# Altium PCB AC_board.PcbDoc (part 3 of 3)
Units mil, origin at the board's own origin, x right, y up, seen from the top; angles counter-clockwise.
Board outline 5905.51 x 3937.01 mil, 4 copper layers (Top Layer, Layer 1, Layer 2, Bottom Layer), stack 31.891 mil thick; 42 components, 37 nets, 171 pads, 2365 vias.
Unrouted connection lines stored in the file: 10.
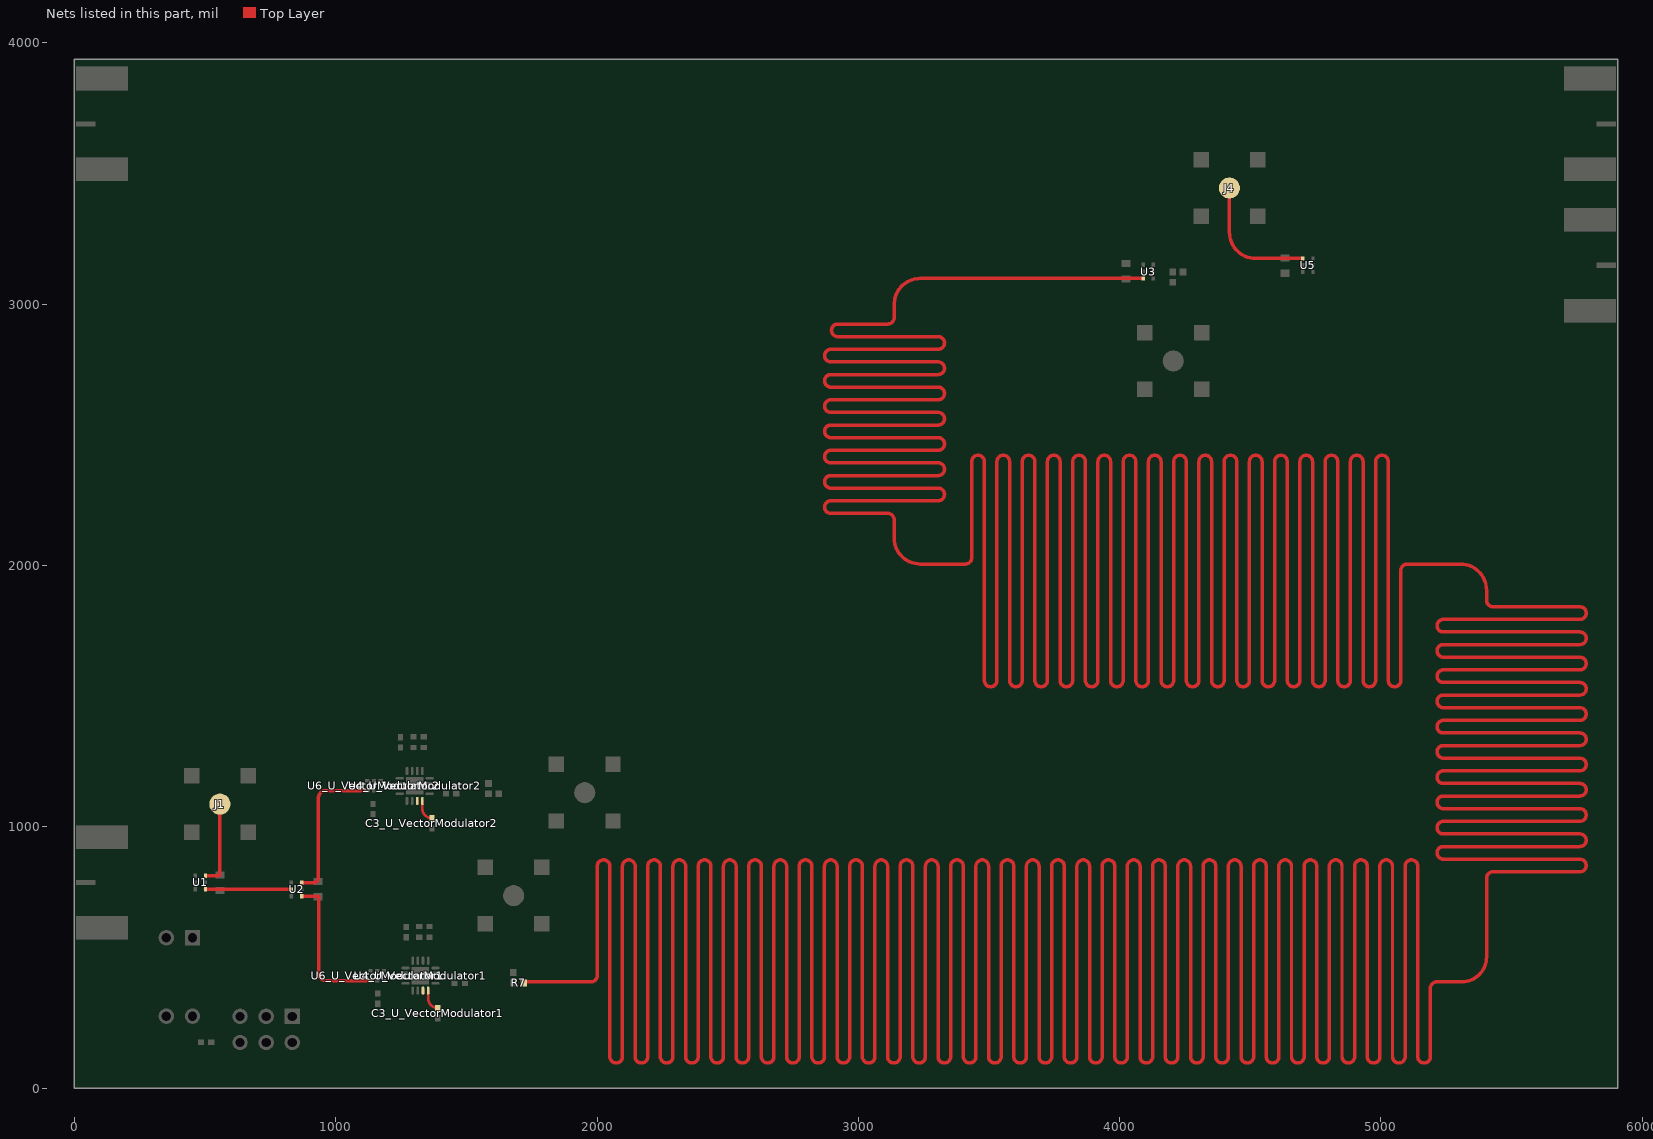
[diagram p5: the nets of this part, all layers, seen from the top]

## Via types
v1: diameter 12, hole 10, Top Layer to Bottom Layer, 1188 vias
v2: diameter 14, hole 10, Top Layer to Bottom Layer, 1145 vias
v3: diameter 15, hole 12, Top Layer to Bottom Layer, 21 vias
v4: diameter 14, hole 12, Top Layer to Bottom Layer, 11 vias

## Nets (pads, with @x,y where several pads share a name; then routed paths per layer and width w, separated by ;. In a path a pad name is that pad's centre, name@x,y a point inside that pad or via, vN(x,y) a via of type N, cw(c..) or ccw(c..) an arc to the next point about the centre after c; other vN are vias at no path point) (continued)
RF-C1-2: R7.2 U3.6 | length 107040.8
  Top Layer w13.3: R7.2@1719.37,403 ccw(c1719.37,405.63) 1722,405.63 1722,407 1970,407 1976.65,407 ccw(c1976.65,431.15) 2000.81,431.15 2000.81,849.83 cw(c2024.96,849.83) 2024.96,873.98 cw(c2024.96,849.83) 2049.11,849.83 2049.11,120.84 ccw(c2073.26,120.84) 2073.26,96.69 ccw(c2073.26,120.84) 2097.42,120.84 2097.42,849.83 cw(c2121.57,849.83) 2121.57,873.98 cw(c2121.57,849.83) 2145.72,849.83 2145.72,120.84 ccw(c2169.87,120.84) 2169.87,96.69 ccw(c2169.87,120.84) 2194.03,120.84 2194.03,849.83 cw(c2218.18,849.83) 2218.18,873.98 cw(c2218.18,849.83) 2242.33,849.83 2242.33,120.84 ccw(c2266.48,120.84) 2266.48,96.69 ccw(c2266.48,120.84) 2290.64,120.84 2290.64,849.83 cw(c2314.79,849.83) 2314.79,873.98 cw(c2314.79,849.83) 2338.94,849.83 2338.94,120.84 ccw(c2363.09,120.84) 2363.09,96.69 ccw(c2363.09,120.84) 2387.25,120.84 2387.25,849.83 cw(c2411.4,849.83) 2411.4,873.98 cw(c2411.4,849.83) 2435.55,849.83 2435.55,120.84 ccw(c2459.7,120.84) 2459.7,96.69 ccw(c2459.7,120.84) 2483.86,120.84 2483.86,849.83 cw(c2508.01,849.83) 2508.01,873.98 cw(c2508.01,849.83) 2532.16,849.83 2532.16,120.84 ccw(c2556.31,120.84) 2556.31,96.69 ccw(c2556.31,120.84) 2580.47,120.84 2580.47,849.83 cw(c2604.62,849.83) 2604.62,873.98 cw(c2604.62,849.83) 2628.77,849.83 2628.77,120.84 ccw(c2652.92,120.84) 2652.92,96.69 ccw(c2652.92,120.84) 2677.08,120.84 2677.08,849.83 cw(c2701.23,849.83) 2701.23,873.98 cw(c2701.23,849.83) 2725.38,849.83 2725.38,120.84 ccw(c2749.53,120.84) 2749.53,96.69 ccw(c2749.53,120.84) 2773.69,120.84 2773.69,849.83 cw(c2797.84,849.83) 2797.84,873.98 cw(c2797.84,849.83) 2821.99,849.83 2821.99,120.84 ccw(c2846.14,120.84) 2846.14,96.69 ccw(c2846.14,120.84) 2870.3,120.84 2870.3,849.83 cw(c2894.45,849.83) 2894.45,873.98 cw(c2894.45,849.83) 2918.6,849.83 2918.6,120.84 ccw(c2942.75,120.84) 2942.75,96.69 ccw(c2942.75,120.84) 2966.91,120.84 2966.91,849.83 cw(c2991.06,849.83) 2991.06,873.98 cw(c2991.06,849.83) 3015.21,849.83 3015.21,120.84 ccw(c3039.36,120.84) 3039.36,96.69 ccw(c3039.36,120.84) 3063.52,120.84 3063.52,849.83 cw(c3087.67,849.83) 3087.67,873.98 cw(c3087.67,849.83) 3111.82,849.83 3111.82,120.84 ccw(c3135.97,120.84) 3135.97,96.69 ccw(c3135.97,120.84) 3160.13,120.84 3160.13,849.83 cw(c3184.28,849.83) 3184.28,873.98 cw(c3184.28,849.83) 3208.43,849.83 3208.43,120.84 ccw(c3232.58,120.84) 3232.58,96.69 ccw(c3232.58,120.84) 3256.74,120.84 3256.74,849.83 cw(c3280.89,849.83) 3280.89,873.98 cw(c3280.89,849.83) 3305.04,849.83 3305.04,120.84 ccw(c3329.19,120.84) 3329.19,96.69 ccw(c3329.19,120.84) 3353.35,120.84 3353.35,849.83 cw(c3377.5,849.83) 3377.5,873.98 cw(c3377.5,849.83) 3401.65,849.83 3401.65,120.84 ccw(c3425.8,120.84) 3425.8,96.69 ccw(c3425.8,120.84) 3449.96,120.84 3449.96,849.83 cw(c3474.11,849.83) 3474.11,873.98 cw(c3474.11,849.83) 3498.26,849.83 3498.26,120.84 ccw(c3522.41,120.84) 3522.41,96.69 ccw(c3522.41,120.84) 3546.57,120.84 3546.57,849.83 cw(c3570.72,849.83) 3570.72,873.98 cw(c3570.72,849.83) 3594.87,849.83 3594.87,120.84 ccw(c3619.02,120.84) 3619.02,96.69 ccw(c3619.02,120.84) 3643.18,120.84 3643.18,849.83 cw(c3667.33,849.83) 3667.33,873.98 cw(c3667.33,849.83) 3691.48,849.83 3691.48,120.84 ccw(c3715.63,120.84) 3715.63,96.69 ccw(c3715.63,120.84) 3739.79,120.84 3739.79,849.83 cw(c3763.94,849.83) 3763.94,873.98 cw(c3763.94,849.83) 3788.09,849.83 3788.09,120.84 ccw(c3812.24,120.84) 3812.24,96.69 ccw(c3812.24,120.84) 3836.4,120.84 3836.4,849.83 cw(c3860.55,849.83) 3860.55,873.98 cw(c3860.55,849.83) 3884.7,849.83 3884.7,120.84 ccw(c3908.85,120.84) 3908.85,96.69 ccw(c3908.85,120.84) 3933.01,120.84 3933.01,849.83 cw(c3957.16,849.83) 3957.16,873.98 cw(c3957.16,849.83) 3981.31,849.83 3981.31,120.84 ccw(c4005.46,120.84) 4005.46,96.69 ccw(c4005.46,120.84) 4029.62,120.84 4029.62,849.83 cw(c4053.77,849.83) 4053.77,873.98 cw(c4053.77,849.83) 4077.92,849.83 4077.92,120.84 ccw(c4102.07,120.84) 4102.07,96.69 ccw(c4102.07,120.84) 4126.23,120.84 4126.23,849.83 cw(c4150.38,849.83) 4150.38,873.98 cw(c4150.38,849.83) 4174.53,849.83 4174.53,120.84 ccw(c4198.68,120.84) 4198.68,96.69 ccw(c4198.68,120.84) 4222.84,120.84 4222.84,849.83 cw(c4246.99,849.83) 4246.99,873.98 cw(c4246.99,849.83) 4271.14,849.83 4271.14,120.84 ccw(c4295.29,120.84) 4295.29,96.69 ccw(c4295.29,120.84) 4319.45,120.84 4319.45,849.83 cw(c4343.6,849.83) 4343.6,873.98 cw(c4343.6,849.83) 4367.75,849.83 4367.75,120.84 ccw(c4391.9,120.84) 4391.9,96.69 ccw(c4391.9,120.84) 4416.06,120.84 4416.06,849.83 cw(c4440.21,849.83) 4440.21,873.98 cw(c4440.21,849.83) 4464.36,849.83 4464.36,120.84 ccw(c4488.51,120.84) 4488.51,96.69 ccw(c4488.51,120.84) 4512.67,120.84 4512.67,849.83 cw(c4536.82,849.83) 4536.82,873.98 cw(c4536.82,849.83) 4560.97,849.83 4560.97,120.84 ccw(c4585.12,120.84) 4585.12,96.69 ccw(c4585.12,120.84) 4609.28,120.84 4609.28,849.83 cw(c4633.43,849.83) 4633.43,873.98 cw(c4633.43,849.83) 4657.58,849.83 4657.58,120.84 ccw(c4681.73,120.84) 4681.73,96.69 ccw(c4681.73,120.84) 4705.89,120.84 4705.89,849.83 cw(c4730.04,849.83) 4730.04,873.98 cw(c4730.04,849.83) 4754.19,849.83 4754.19,120.84 ccw(c4778.34,120.84) 4778.34,96.69 ccw(c4778.34,120.84) 4802.5,120.84 4802.5,849.83 cw(c4826.65,849.83) 4826.65,873.98 cw(c4826.65,849.83) 4850.8,849.83 4850.8,120.84 ccw(c4874.95,120.84) 4874.95,96.69 ccw(c4874.95,120.84) 4899.11,120.84 4899.11,849.83 cw(c4923.26,849.83) 4923.26,873.98 cw(c4923.26,849.83) 4947.41,849.83 4947.41,120.84 ccw(c4971.56,120.84) 4971.56,96.69 ccw(c4971.56,120.84) 4995.72,120.84 4995.72,849.83 cw(c5019.87,849.83) 5019.87,873.98 cw(c5019.87,849.83) 5044.02,849.83 5044.02,120.84 ccw(c5068.17,120.84) 5068.17,96.69 ccw(c5068.17,120.84) 5092.33,120.84 5092.33,849.83 cw(c5116.48,849.83) 5116.48,873.98 cw(c5116.48,849.83) 5140.63,849.83 5140.63,120.84 ccw(c5164.78,120.84) 5164.78,96.69 ccw(c5164.78,120.84) 5188.94,120.84 5188.94,382.85 cw(c5213.09,382.85) 5213.09,407 5257.05,407 5308,407 ccw(c5308,503) 5404,503 5404,691 5404,693 5404,766.96 5404,804.17 cw(c5428.15,804.17) 5428.15,828.32 5761.41,828.32 ccw(c5761.41,852.47) 5785.56,852.47 ccw(c5761.41,852.47) 5761.41,876.62 5238.89,876.62 cw(c5238.89,900.78) 5214.74,900.78 cw(c5238.89,900.78) 5238.89,924.93 5761.41,924.93 ccw(c5761.41,949.08) 5785.56,949.08 ccw(c5761.41,949.08) 5761.41,973.23 5238.89,973.23 cw(c5238.89,997.39) 5214.74,997.39 cw(c5238.89,997.39) 5238.89,1021.54 5761.41,1021.54 ccw(c5761.41,1045.69) 5785.56,1045.69 ccw(c5761.41,1045.69) 5761.41,1069.84 5238.89,1069.84 cw(c5238.89,1094) 5214.74,1094 cw(c5238.89,1094) 5238.89,1118.15 5761.41,1118.15 ccw(c5761.41,1142.3) 5785.56,1142.3 ccw(c5761.41,1142.3) 5761.41,1166.45 5238.89,1166.45 cw(c5238.89,1190.61) 5214.74,1190.61 cw(c5238.89,1190.61) 5238.89,1214.76 5761.41,1214.76 ccw(c5761.41,1238.91) 5785.56,1238.91 ccw(c5761.41,1238.91) 5761.41,1263.06 5238.89,1263.06 cw(c5238.89,1287.22) 5214.74,1287.22 cw(c5238.89,1287.22) 5238.89,1311.37 5761.41,1311.37 ccw(c5761.41,1335.52) 5785.56,1335.52 ccw(c5761.41,1335.52) 5761.41,1359.67 5238.89,1359.67 cw(c5238.89,1383.83) 5214.74,1383.83 cw(c5238.89,1383.83) 5238.89,1407.98 5761.41,1407.98 ccw(c5761.41,1432.13) 5785.56,1432.13 ccw(c5761.41,1432.13) 5761.41,1456.28 5238.89,1456.28 cw(c5238.89,1480.44) 5214.74,1480.44 cw(c5238.89,1480.44) 5238.89,1504.59 5761.41,1504.59 ccw(c5761.41,1528.74) 5785.56,1528.74 ccw(c5761.41,1528.74) 5761.41,1552.89 5238.89,1552.89 cw(c5238.89,1577.05) 5214.74,1577.05 cw(c5238.89,1577.05) 5238.89,1601.2 5761.41,1601.2 ccw(c5761.41,1625.35) 5785.56,1625.35 ccw(c5761.41,1625.35) 5761.41,1649.5 5238.89,1649.5 cw(c5238.89,1673.66) 5214.74,1673.66 cw(c5238.89,1673.66) 5238.89,1697.81 5761.41,1697.81 ccw(c5761.41,1721.96) 5785.56,1721.96 ccw(c5761.41,1721.96) 5761.41,1746.11 5238.89,1746.11 cw(c5238.89,1770.27) 5214.74,1770.27 cw(c5238.89,1770.27) 5238.89,1794.42 5761.41,1794.42 ccw(c5761.41,1818.57) 5785.56,1818.57 ccw(c5761.41,1818.57) 5761.41,1842.72 5428.15,1842.72 cw(c5428.15,1866.88) 5404,1866.88 5404,1873.53 5404,1906 ccw(c5304,1906) 5304,2006 5121,2006 5118,2006 5107,2006 5100.35,2006 ccw(c5100.35,1981.85) 5076.19,1981.85 5076.19,1560.55 cw(c5052.04,1560.55) 5052.04,1536.4 cw(c5052.04,1560.55) 5027.89,1560.55 5027.89,2398.42 ccw(c5003.74,2398.42) 5003.74,2422.58 ccw(c5003.74,2398.42) 4979.58,2398.42 4979.58,1560.55 cw(c4955.43,1560.55) 4955.43,1536.4 cw(c4955.43,1560.55) 4931.28,1560.55 4931.28,2398.42 ccw(c4907.13,2398.42) 4907.13,2422.58 ccw(c4907.13,2398.42) 4882.97,2398.42 4882.97,1560.55 cw(c4858.82,1560.55) 4858.82,1536.4 cw(c4858.82,1560.55) 4834.67,1560.55 4834.67,2398.42 ccw(c4810.52,2398.42) 4810.52,2422.58 ccw(c4810.52,2398.42) 4786.36,2398.42 4786.36,1560.55 cw(c4762.21,1560.55) 4762.21,1536.4 cw(c4762.21,1560.55) 4738.06,1560.55 4738.06,2398.42 ccw(c4713.91,2398.42) 4713.91,2422.58 ccw(c4713.91,2398.42) 4689.75,2398.42 4689.75,1560.55 cw(c4665.6,1560.55) 4665.6,1536.4 cw(c4665.6,1560.55) 4641.45,1560.55 4641.45,2398.42 ccw(c4617.3,2398.42) 4617.3,2422.58 ccw(c4617.3,2398.42) 4593.14,2398.42 4593.14,1560.55 cw(c4568.99,1560.55) 4568.99,1536.4 cw(c4568.99,1560.55) 4544.84,1560.55 4544.84,2398.42 ccw(c4520.69,2398.42) 4520.69,2422.58 ccw(c4520.69,2398.42) 4496.53,2398.42 4496.53,1560.55 cw(c4472.38,1560.55) 4472.38,1536.4 cw(c4472.38,1560.55) 4448.23,1560.55 4448.23,2398.42 ccw(c4424.08,2398.42) 4424.08,2422.58 ccw(c4424.08,2398.42) 4399.92,2398.42 4399.92,1560.55 cw(c4375.77,1560.55) 4375.77,1536.4 cw(c4375.77,1560.55) 4351.62,1560.55 4351.62,2398.42 ccw(c4327.47,2398.42) 4327.47,2422.58 ccw(c4327.47,2398.42) 4303.31,2398.42 4303.31,1560.55 cw(c4279.16,1560.55) 4279.16,1536.4 cw(c4279.16,1560.55) 4255.01,1560.55 4255.01,2398.42 ccw(c4230.86,2398.42) 4230.86,2422.58 ccw(c4230.86,2398.42) 4206.7,2398.42 4206.7,1560.55 cw(c4182.55,1560.55) 4182.55,1536.4 cw(c4182.55,1560.55) 4158.4,1560.55 4158.4,2398.42 ccw(c4134.25,2398.42) 4134.25,2422.58 ccw(c4134.25,2398.42) 4110.09,2398.42 4110.09,1560.55 cw(c4085.94,1560.55) 4085.94,1536.4 cw(c4085.94,1560.55) 4061.79,1560.55 4061.79,2398.42 ccw(c4037.64,2398.42) 4037.64,2422.58 ccw(c4037.64,2398.42) 4013.48,2398.42 4013.48,1560.55 cw(c3989.33,1560.55) 3989.33,1536.4 cw(c3989.33,1560.55) 3965.18,1560.55 3965.18,2398.42 ccw(c3941.03,2398.42) 3941.03,2422.58 ccw(c3941.03,2398.42) 3916.87,2398.42 3916.87,1560.55 cw(c3892.72,1560.55) 3892.72,1536.4 cw(c3892.72,1560.55) 3868.57,1560.55 3868.57,2398.42 ccw(c3844.42,2398.42) 3844.42,2422.58 ccw(c3844.42,2398.42) 3820.26,2398.42 3820.26,1560.55 cw(c3796.11,1560.55) 3796.11,1536.4 cw(c3796.11,1560.55) 3771.96,1560.55 3771.96,2398.42 ccw(c3747.81,2398.42) 3747.81,2422.58 ccw(c3747.81,2398.42) 3723.65,2398.42 3723.65,1560.55 cw(c3699.5,1560.55) 3699.5,1536.4 cw(c3699.5,1560.55) 3675.35,1560.55 3675.35,2398.42 ccw(c3651.2,2398.42) 3651.2,2422.58 ccw(c3651.2,2398.42) 3627.04,2398.42 3627.04,1560.55 cw(c3602.89,1560.55) 3602.89,1536.4 cw(c3602.89,1560.55) 3578.74,1560.55 3578.74,2398.42 ccw(c3554.59,2398.42) 3554.59,2422.58 ccw(c3554.59,2398.42) 3530.43,2398.42 3530.43,1560.55 cw(c3506.28,1560.55) 3506.28,1536.4 cw(c3506.28,1560.55) 3482.13,1560.55 3482.13,2398.42 ccw(c3457.98,2398.42) 3457.98,2422.58 ccw(c3457.98,2398.42) 3433.82,2398.42 3433.82,2030.15 cw(c3409.67,2030.15) 3409.67,2006 3354.9,2006 3237,2006 cw(c3237,2106) 3137,2106 3137,2169.02 3137,2175.67 ccw(c3112.85,2175.67) 3112.85,2199.82 2895.15,2199.82 cw(c2895.15,2223.97) 2871,2223.97 cw(c2895.15,2223.97) 2895.15,2248.13 3305.64,2248.13 ccw(c3305.64,2272.28) 3329.79,2272.28 ccw(c3305.64,2272.28) 3305.64,2296.43 2895.15,2296.43 cw(c2895.15,2320.58) 2871,2320.58 cw(c2895.15,2320.58) 2895.15,2344.74 3305.64,2344.74 ccw(c3305.64,2368.89) 3329.79,2368.89 ccw(c3305.64,2368.89) 3305.64,2393.04 2895.15,2393.04 cw(c2895.15,2417.19) 2871,2417.19 cw(c2895.15,2417.19) 2895.15,2441.35 3305.64,2441.35 ccw(c3305.64,2465.5) 3329.79,2465.5 ccw(c3305.64,2465.5) 3305.64,2489.65 2895.15,2489.65 cw(c2895.15,2513.8) 2871,2513.8 cw(c2895.15,2513.8) 2895.15,2537.96 3305.64,2537.96 ccw(c3305.64,2562.11) 3329.79,2562.11 ccw(c3305.64,2562.11) 3305.64,2586.26 2895.15,2586.26 cw(c2895.15,2610.41) 2871,2610.41 cw(c2895.15,2610.41) 2895.15,2634.57 3305.64,2634.57 ccw(c3305.64,2658.72) 3329.79,2658.72 ccw(c3305.64,2658.72) 3305.64,2682.87 2895.15,2682.87 cw(c2895.15,2707.02) 2871,2707.02 cw(c2895.15,2707.02) 2895.15,2731.18 3305.64,2731.18 ccw(c3305.64,2755.33) 3329.79,2755.33 ccw(c3305.64,2755.33) 3305.64,2779.48 2895.15,2779.48 cw(c2895.15,2803.63) 2871,2803.63 cw(c2895.15,2803.63) 2895.15,2827.79 3305.64,2827.79 ccw(c3305.64,2851.94) 3329.79,2851.94 ccw(c3305.64,2851.94) 3305.64,2876.09 2921.22,2876.09 cw(c2921.22,2900.24) 2897.07,2900.24 cw(c2921.22,2900.24) 2921.22,2924.4 3112.85,2924.4 ccw(c3112.85,2948.55) 3137,2948.55 3137,2972.7 3137,2999.02 3139.45,3021.03 3143.19,3033.65 cw(c3237,2999.02) 3145.92,3040.3 cw(c3237,2999.02) 3237,3099.02 U3.6@4090,3099.02
RF-S1: U1.4 U2.2 | length 327.1
  Top Layer w13.3: U1.4@501.57,761.51 U2.2@828.67,761.51
RF-S2-1: U2.6 U6_U_VectorModulator2.1 | length 576.3
  Top Layer w13.3: U2.6@869,787.05 916.56,787.05 ; 917.05,786.98 ccw(c917.05,802.93) 933,802.93 933,1107.86 cw(c967.14,1107.86) 943,1132 cw(c957.49,1117.51) 957.49,1138 1109.42,1138 cw(c1109.42,1122.05) U6_U_VectorModulator2.1@1113.34,1137.51
RF-S2-2: U2.4 U6_U_VectorModulator1.1 | length 569.7
  Top Layer w13.3: U2.4@869.49,735.02 936,735.02 936,438 ccw(c962.05,438) 962.05,411.95 U6_U_VectorModulator1.1@1127.33,411.02
RXin: J4.C U5.4 | length 503.9
  Top Layer w13.3: J4.C@4420,3445 4420,3275.59 ccw(c4520,3275.59) 4520,3175.59 U5.4@4697.41,3175.59
TXout: J1.C U1.6 | length 309.3
  Top Layer w13.3: U1.6@501.99,813.58 553.87,813.58 ; 553.55,813.48 557,816.93 J1.C@557,1064.11 ; J1.C@568.84,1083.84 cw(c572.27,1083.84) J1.C@572.27,1087.27
VCC-IN1_U_VectorModulator1: C3_U_VectorModulator1.2 U4_U_VectorModulator1.7 U4_U_VectorModulator1.8 | length 97.1
  Top Layer w10: U4_U_VectorModulator1.7@1333.98,363.63 U4_U_VectorModulator1.7@1333.98,373.63 ; U4_U_VectorModulator1.8@1353.67,373.63 1353.67,343.94 ccw(c1390.24,343.94) C3_U_VectorModulator1.2@1390.24,307.37
VCC-IN1_U_VectorModulator2: C3_U_VectorModulator2.2 U4_U_VectorModulator2.7 U4_U_VectorModulator2.8 | length 97.1
  Top Layer w10: U4_U_VectorModulator2.7@1312.06,1089.63 U4_U_VectorModulator2.7@1312.06,1099.63 ; U4_U_VectorModulator2.8@1331.74,1099.63 1331.74,1069.94 ccw(c1368.31,1069.94) C3_U_VectorModulator2.2@1368.31,1033.37
pads on no net: R1.1 R1.2 R2.1 R2.2 R3.1 R3.2 R4.1 R4.2 U4_U_VectorModulator1.1 U4_U_VectorModulator1.4 U4_U_VectorModulator1.10 U4_U_VectorModulator1.11 U4_U_VectorModulator1.12 U4_U_VectorModulator1.15 U4_U_VectorModulator1.16 U4_U_VectorModulator2.1 U4_U_VectorModulator2.4 U4_U_VectorModulator2.10 U4_U_VectorModulator2.11 U4_U_VectorModulator2.12 U4_U_VectorModulator2.15 U4_U_VectorModulator2.16 U6_U_VectorModulator1.6 U6_U_VectorModulator2.6

## Polygon pours and split planes (outlines as drawn)
AGND on Layer 1 "GND-2" (solid, shelved, pour order 4): 0,3937.01 5905.51,3937.01 5905.51,0 0,0
AGND on Layer 2 "GND-3" (solid, shelved, pour order 6): 0,3937.01 5905.51,3937.01 5905.51,0 0,0
AGND on Bottom Layer "GND-4" (solid, shelved, pour order 8): 0,3937.01 5905.51,3937.01 5905.51,0 0,0
AGND on Top Layer "GND-1" (solid, shelved, pour order 2): 0,3937.01 5905.51,3937.01 5905.51,0 0,0

## Silkscreen, mask and mechanical layers (free items; w line width, h text height)
Top Overlay:
  drawing of 581 lines, arcs and shapes, not listed
  text "CPWG [20mils Iso] 13.305 mils" at 2352.76,3738.01 h40
  text "8 ns (56668.82 mils)" at 1079,3448.56 h40
  text "AC board / Rev 2" at 1250.84,2124.61 h40
  text "15 ns (107038.5mils)" at 3782.16,1022.34 h40
  text "8V /  / I-1 /  / Q-1" at 902,337 h35 r90
  text "GND /  / I-2 /  / Q-2" at 907,-5 h35 r90
Top Solder:
  lines w10: 1172.3,1137.51 cw(c1195.38,1114.43) 1195.38,1147.07 1244.93,1147.07 ; 1172.3,1176.49 ccw(c1195.8,1199.98) 1195.8,1166.76 1244.93,1166.76 ; 1184.97,411.02 cw(c1195.02,411.02) 1195.02,421.07 1266.86,421.07 ; 1184.97,450 ccw(c1194.21,450) 1194.21,440.76 1266.86,440.76
  lines w13.3: 43.5,787.4 462.6,787.4 ; 44.41,3690.91 5861.1,3690.91 ; 501.62,761.42 828.71,761.42 ; 501.67,813.48 553.55,813.48 ; 557,816.93 557,1064.11 ; 626,2137.72 626,1934 ccw(c689,1934) 689,1871 735.1,1871 ; 626.46,3061.54 cw(c726,3052) 726,3152 870.63,3152 ; 869.49,735.02 936,735.02 936,438 ccw(c962.05,438) 962.05,411.95 1127.33,411.02 ; 869.49,786.98 917.05,786.98 ; 933,1092 933,802.93 933,1098 ; 933,1107.86 cw(c967.14,1107.86) 943,1132 cw(c957.49,1117.51) 957.49,1138 ; 966,1138 1109.42,1138 ; 1359.5,1127.39 1420.7,1127.39 ; 1381.43,401.39 1454.86,401.39 ; 1461,1127 1585,1127 ; 1495.26,402.41 1679.1,402.41 ; 1585,1166.37 1585,1380 cw(c1685,1380) 1685,1480 2845,1480 ccw(c2845,1541) 2906,1541 2906,1771 ccw(c2806,1771) 2806,1871 2690.34,1871 ; 1624.37,1129 1980.34,1129 ; 1679,454.27 1679,731 ; 1722,407 1970,407 ; 2891.49,3152 4088.98,3152 2935,3152 ; 3137,2169.02 3137,2106 ccw(c3237,2106) 3237,2006 3354.9,2006 ; 3145.92,3040.3 cw(c3237,2999.02) 3237,3099.02 4090,3099.02 ; 4129.67,3124.31 4202.63,3124.31 ; 4203,2783 4203,3084.31 ; 4244,3123.62 4701.02,3124.16 ; 4420,3445 4420,3275.59 ccw(c4520,3275.59) 4520,3175.59 4697.41,3175.59 ; 4740,3149.61 5862.01,3149.61 ; 5121,2006 5304,2006 cw(c5304,1906) 5404,1906 5404,1873.53 ; 5257.05,407 5308,407 ccw(c5308,503) 5404,503 5404,691 ; 5404,693 5404,766.96
Board Outline:
  the board outline again, w10

## Text inside footprints (layer, text, board x,y; h text height)
P1: Top Overlay "6" at 574,195 h50 r180; Top Overlay "5" at 574,295 h50 r180; Top Overlay "2" at 934,195 h50 r180; Top Overlay "1" at 914,295 h50 r180